# Altium PCB PCB AutoTimer.PcbDoc
Units mm, origin at the board's own origin, x right, y up, seen from the top; angles counter-clockwise.
Board outline 83 x 118 mm, 2 copper layers (Top Layer, Bottom Layer), stack 1.071 mm thick; 45 components, 55 nets, 187 pads, 9 vias.
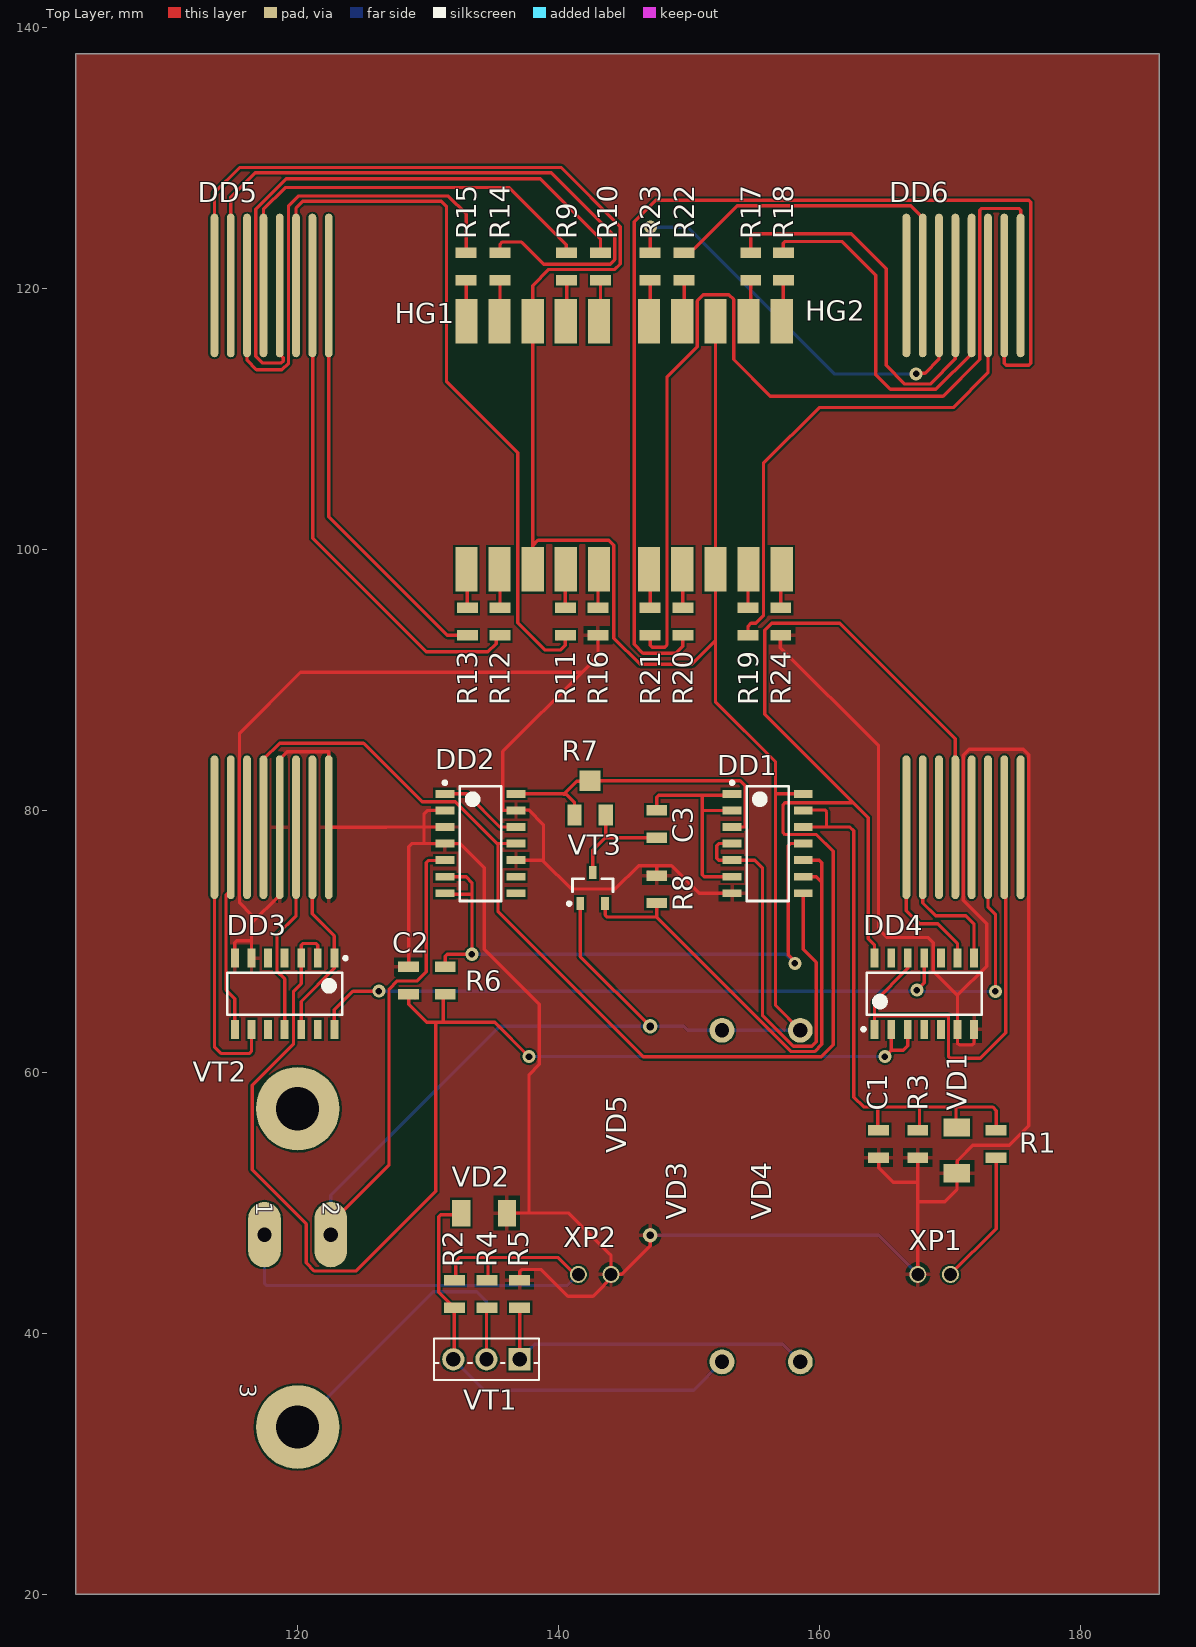
[diagram p0: Top Layer view]
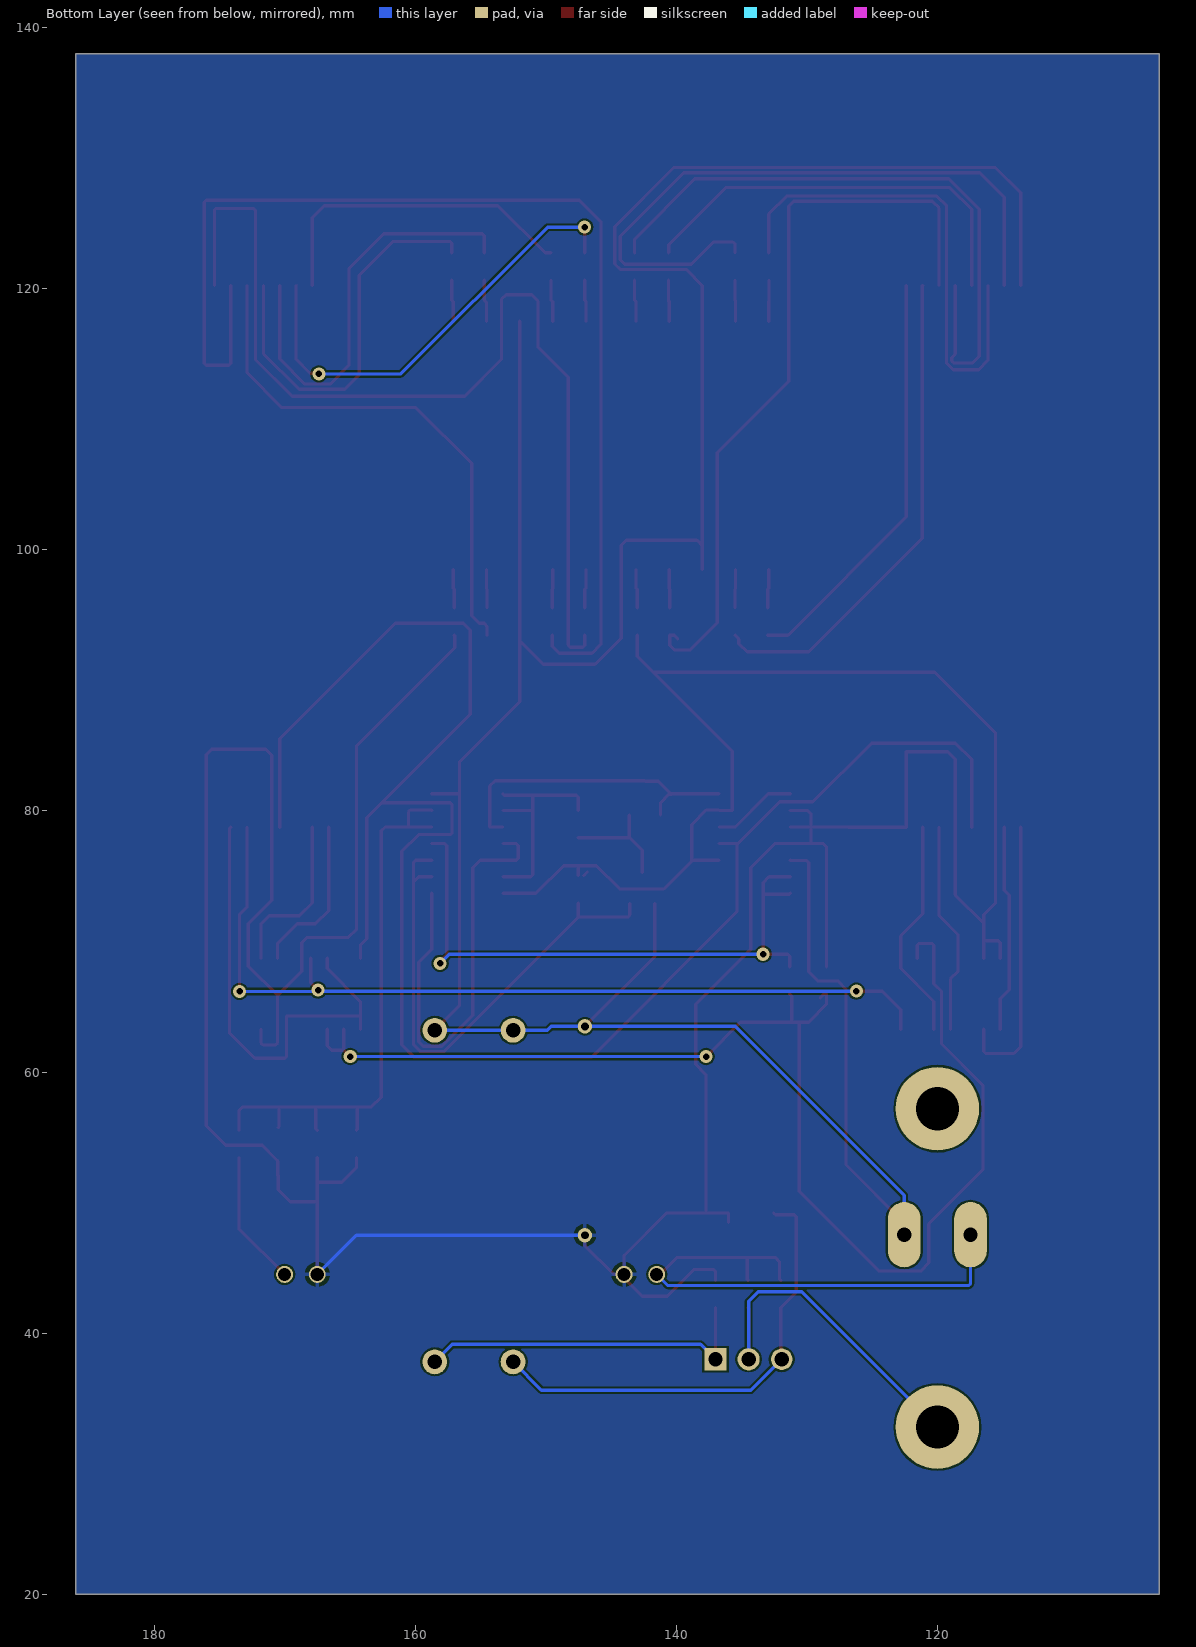
[diagram p1: Bottom Layer view, seen from below]

## Layer stack, top to bottom
Top Solder: solder mask 0.0102, Solder Resist, Dk 3.5
Top Layer: signal copper 0.0356
Dielectric 1: dielectric 1, FR-4, Dk 4.8
Bottom Layer: signal copper 0.0356
Bottom Solder: solder mask 0.0102, Solder Resist, Dk 3.5

## Board outline
103,20 103,138 186,138 186,20

## Design rules (kind name [scope] priority, off if disabled: settings)
Clearance [All] p1: gap=0.15 ignorepadtopadclearanceinfootprint=FALSE except(0.2: Via-Via; 0.3: THPad-THPad)
ComponentClearance [All] p1: gap=0.5 collisioncheckmode=3 verticalgap=0 showdistances=FALSE
HoleSize [All] p1: absolutevalues=TRUE maxlimit=5 minlimit=0.3 maxpercent=80.000 minpercent=20.000
PolygonConnect [All] p1: connectstyle=Relief reliefconductorwidth=0.3 reliefentries=4 polygonreliefangle="90 Angle" airgapwidth=0.3
RoutingVias [All] p1: holewidth=0.5 width=1 viastyle="Through Hole" minholewidth=0.3 minwidth=0.5 maxholewidth=1 maxwidth=1.5
SolderMaskExpansion [All] p1: expansion=0.102 istentingtop=FALSE
Width [All] p1: maxlimit=1 minlimit=0.25 preferedwidth=0.254
28 further rules are at their usual default settings.

## Components (designator, comment, footprint, x,y, rotation, side; value= is the part's Value field where it differs from the comment)
C1 "С-0805 50 В 4,7 мкФ 10% X7R KEMET" 0805 164.5,54.5 r90 top value="4,7 мкФ"
C2 "С-0805 50 В 1 мкФ 10% X7R KEMET" 0805 128.5,67 r90 top value="1 мкФ"
C3 "С-0805 50 В 1 мкФ 10% X7R KEMET" 0805 147.5,79 r90 top value="1 мкФ"
DD1 "SN74LS00 Texas Insturments" "SN74LS00 SN74LS90 FOOTPRINT" 156,77.5 r0 top
DD2 "SN74LS90 Texas Insturments" "SN74LS00 SN74LS90 FOOTPRINT" 134,77.5 r0 top
DD3 "SN74LS90 Texas Insturments" "SN74LS00 SN74LS90 FOOTPRINT" 119,66 r270 top
DD4 "SN74LS90 Texas Insturments" "SN74LS00 SN74LS90 FOOTPRINT" 168,66 r90 top
DD5 "К514ПР1 *" "К514ПР1 FOOTPRINT" 118,99.5 r270 top
DD6 "К514ПР1 *" "К514ПР1 FOOTPRINT" 171,99.5 r270 top
HG1 "KCSA56-105 Kingbright" KCSA56-105_FOOTPRINT 138,108 r0 top
HG2 "KCSA56-105 Kingbright" KCSA56-105_FOOTPRINT 152,108 r0 top
R1 "R-0805 0,125 Вт 6,2 кОм 5% Yageo" 0805 173.5,54.5 r270 top value="6,2 кОм"
R2 "R-0805 0,125 Вт 3 кОм 5% Yageo" 0805 132,43 r90 top value="3 кОм"
R3 "R-0805 0,125 Вт 2 кОм 5% Yageo" 0805 167.5,54.5 r90 top value="2 кОм"
R4 "R-0805 0,125 Вт 510 Ом 5% Yageo" 0805 134.5,43 r270 top value="510 Ом"
R5 "R-0805 0,125 Вт 390 Ом 5% Yageo" 0805 137,43 r270 top value="390 Ом"
R6 "R-0805 0,125 Вт 1,2 кОм 5% Yageo" 0805 131.3,67 r90 top value="1,2 кОм"
R7 "3313J-1 0,125 Вт 10 кОм 20% Mouzer" "R-3313J-1 FOOTPRINT" 142.4,81 r0 top value="10 кОм"
R8 "R-0805 0,125 Вт 300 Ом 5% Yageo" 0805 147.5,74 r270 top value="300 Ом"
R9 "R-0805 0,125 Вт 240 Ом 5% Yageo" 0805 140.6,121.7 r270 top value="240 Ом"
R10 "R-0805 0,125 Вт 240 Ом 5% Yageo" 0805 143.2,121.7 r270 top value="240 Ом"
R11 "R-0805 0,125 Вт 240 Ом 5% Yageo" 0805 140.5,94.5 r90 top value="240 Ом"
R12 "R-0805 0,125 Вт 240 Ом 5% Yageo" 0805 135.5,94.5 r90 top value="240 Ом"
R13 "R-0805 0,125 Вт 240 Ом 5% Yageo" 0805 133,94.5 r90 top value="240 Ом"
R14 "R-0805 0,125 Вт 240 Ом 5% Yageo" 0805 135.5,121.7 r270 top value="240 Ом"
R15 "R-0805 0,125 Вт 240 Ом 5% Yageo" 0805 132.9,121.7 r270 top value="240 Ом"
R16 "R-0805 0,125 Вт 240 Ом 5% Yageo" 0805 143,94.5 r90 top value="240 Ом"
R17 "R-0805 0,125 Вт 240 Ом 5% Yageo" 0805 154.7,121.7 r270 top value="240 Ом"
R18 "R-0805 0,125 Вт 240 Ом 5% Yageo" 0805 157.2,121.7 r270 top value="240 Ом"
R19 "R-0805 0,125 Вт 240 Ом 5% Yageo" 0805 154.5,94.5 r90 top value="240 Ом"
R20 "R-0805 0,125 Вт 240 Ом 5% Yageo" 0805 149.5,94.5 r90 top value="240 Ом"
R21 "R-0805 0,125 Вт 240 Ом 5% Yageo" 0805 147,94.5 r90 top value="240 Ом"
R22 "R-0805 0,125 Вт 240 Ом 5% Yageo" 0805 149.6,121.7 r270 top value="240 Ом"
R23 "R-0805 0,125 Вт 240 Ом 5% Yageo" 0805 147,121.7 r270 top value="240 Ом"
R24 "R-0805 0,125 Вт 240 Ом 5% Yageo" 0805 157,94.5 r90 top value="240 Ом"
VD1 "1N4624 BSC" DO-213 170.5,54 r90 top
VD2 "1N4624 BSC" DO-213 134.275,49.2 r180 top
VD3 "1N533B MICROSEMI" T-18 152.5,50.5 r90 top
VD4 "1N533B MICROSEMI" T-18 158.5,50.5 r270 top
VD5 "1N710A MICROCHIP" DO-35 147,55.5 r90 top
VT1 "BD233 SavantIC" ТО-126 137,38 r180 top
VT2 "2N5887 ETC" TO66 120,45 r270 top
VT3 "2N3458 MOTOROLA" SOT23 142.6,74.1 r90 top
XP1 "DS1021 Ningbo Zhenqin Electronic" PLS-2 170,44.5 r180 top
XP2 "DS1021 Ningbo Zhenqin Electronic" PLS-2 141.5,44.5 r0 top

## Footprints (in the part's own frame and the unit in brackets; to place one, negate y for a bottom-side part, rotate by r counter-clockwise, add the part's x,y. Pads: shape width x height; smd on the part's side, far side on the other; paste and mask are expansions set on the pad)
0805 [mm]
  rect 0.8x1.6 smd: 1(-1.05,0) 2(1.05,0)
  body extent -1.05,-0.65 1.05,0.65, height 0.4
DO-35 [mm]
  round 1.1 hole 0.6: 1(-8,0) 2(8,0)
  body extent -2.2,-0.9 2.2,1, height 1.9
DO-213 [mm]
  rect 1.4x2.03 smd: 1(-1.75,0) 2(1.75,0)
  body extent -2.65,-1.2 2.65,1.2, height 1.7
KCSA56-105_FOOTPRINT [mm]
  rect 1.7x3.4 smd: 1(-5.08,-9.5) 2(-2.54,-9.5) 3(0,-9.5) 4(2.54,-9.5) 5(5.08,-9.5) 6(5.08,9.5) 7(2.54,9.5) 8(0,9.5) 9(-2.54,9.5) 10(-5.08,9.5)
  body extent -6.18,-11.3 6.12,11.3, height 3.75
PLS-2 [mm]
  round 1.3 hole 1: 1(0,0) 2(2.5,0)
  body extent -1.31,-1.27 3.77,1.27, height 8.47
"R-3313J-1 FOOTPRINT" [mm]
  rect 1.1x1.6 smd: 1(1.195,-1.31) 3(-1.195,-1.31)
  rect 1.6x1.6 smd: 2(0,1.31)
  body extent -1.95,-2.28 1.97,2.29, height 2.2
"SN74LS00 SN74LS90 FOOTPRINT" [mm] "SOIC, 14-Leads, Body 8,65x3,90mm, Pitch 1,27mm, IPC Medium Density"
  rect 1.45x0.6 smd: 1(-2.725,3.81) 2(-2.725,2.54) 3(-2.725,1.27) 4(-2.725,0) 5(-2.725,-1.27) 6(-2.725,-2.54) 7(-2.725,-3.81) 8(2.725,-3.81) 9(2.725,-2.54) 10(2.725,-1.27) 11(2.725,0) 12(2.725,1.27) 13(2.725,2.54) 14(2.725,3.81)
  silkscreen extent -2.85,-4.4 1.6,4.78, body extent -2,-4.4 2,4.4, height 1.75
SOT23 [mm] "SOT23, 3-Leads, Body 2,86x2,45mm, Pitch 0,95mm, IPC Medium Density"
  rect 1x0.6 smd: 1(-1.2,0.95) 2(-1.2,-0.95) 3(1.2,0)
  silkscreen extent -1.32,-1.55 0.7,1.92, body extent -0.7,-1.52 0.7,1.53, height 1.02
T-18 [mm]
  round 1.9 hole 1.1: 1(-12.7,0) 2(12.7,0)
  body extent -4.44,-1.84 4.44,1.84, height 3.68
TO66 [mm]
  oval 5x2.5 hole 1.1: 1(-2.54,-2.54) 2(-2.54,2.54)
  round 6.4 hole 3.3: 3(12.192,0) 4(-12.192,0)
  body extent -15.9,-8.64 15.9,8.64, height 8.6
"К514ПР1 FOOTPRINT" [mm]
  oval 11x0.6 smd: 1(20.75,-4.375) 2(20.75,-3.125) 3(20.75,-1.875) 4(20.75,-0.625) 5(20.75,0.625) 6(20.75,1.875) 7(20.75,3.125) 8(20.75,4.375) 9(-20.75,4.375) 10(-20.75,3.125) 11(-20.75,1.875) 12(-20.75,0.625) 13(-20.75,-0.625) 14(-20.75,-1.875) 15(-20.75,-3.125) 16(-20.75,-4.375)
  body extent -15.5,-5.87 15.5,6.13, height 2.5
ТО-126 [mm]
  rect 1.7x1.7 hole 1.1 mask+0: 1(0,0)
  round 1.7 hole 1.1 mask+0: 2(2.54,0)
  round 1.7 / inner round 1.651 / far side round 1.651 hole 1.1 mask+0: 3(5.08,0)
  silkscreen extent -1.49,-1.57 6.57,1.57, body extent -1.36,-1.45 6.44,1.45, height 8.89

## Part data
C1: library part "C-0805 4,7мкФ", "0805", Manufacturer=KEMET, Package=С-0805, Temp_Coef=X7R, Tolerance=10%, Voltage="50 В", ComponentLink1Description="New link", ComponentLink1URL=https://electronoff.ua/good/kondensator-keramicheskij-0805-4-7uf-50v-x7r-10-100sht.php
C2 C3: library part "C-0805 1мкФ", "0805", Manufacturer=KEMET, Package=С-0805, Temp_Coef=X7R, Tolerance=10%, Voltage="50 В", ComponentLink1Description="New link", ComponentLink1URL=https://electronoff.ua/good/kondensator-keramicheskij-1206-1uf-50v-x7r-10-100sht.php
DD1: library part SN74LS00, Manufacturer="Texas Insturments", ComponentLink1Description=datasheet, ComponentLink1URL=file:///C:/Users/aleks/Downloads/Telegram%20Desktop/sn7400-sp.pdf, Name=SN74LS00
DD2 DD3 DD4: library part SN74LS90, Manufacturer="Texas Insturments", ComponentLink1Description=datasheet, ComponentLink1URL=file:///C:/Users/aleks/Downloads/Telegram%20Desktop/SN7490AN.pdf, Name=SN74LS90
DD5 DD6: library part К514ПР1, ComponentLink1Description=datasheet, ComponentLink1URL=http://ic-info.ru/upload/iblock/20e/514%D0%9F%D0%A01.pdf, Name=К514ПР1
HG1 HG2: library part KCSA56-105, Manufacturer=Kingbright, ComponentLink1Description=datasheet, ComponentLink1URL=http://www.kosmodrom.com.ua/pdf/KCSA56-105.pdf, Name=KCSA56-105
R1: library part "R-0805 6,2кОм", Manufacturer=Yageo, Package=R-0805, Power="0,125 Вт", Tolerance=5%
R2: library part "R-0805 3кОм", Manufacturer=Yageo, Package=R-0805, Power="0,125 Вт", Tolerance=5%
R3: library part "R-0805 2кОм", Manufacturer=Yageo, Package=R-0805, Power="0,125 Вт", Tolerance=5%
R4: library part "R-0805 510Ом", Manufacturer=Yageo, Package=R-0805, Power="0,125 Вт", Tolerance=5%
R5: library part "R-0805 390Ом", Manufacturer=Yageo, Package=R-0805, Power="0,125 Вт", Tolerance=5%
R6: library part "R-0805 1,2кОм", Manufacturer=Yageo, Package=R-0805, Power="0,125 Вт", Tolerance=5%
R7: library part "R-3313J-1 10кОм", Manufacturer=Mouzer, Package=3313J-1, Power="0,125 Вт", Tolerance=20%, ComponentLink1Description="New link", ComponentLink1URL=https://eu.mouser.com/datasheet/2/54/3313-776425.pdf
R8: library part "R-0805 300Ом", Manufacturer=Yageo, Package=R-0805, Power="0,125 Вт", Tolerance=5%
R9 R10 R11 R12 R13 R14 R15 R16 R17 R18 R19 R20 R21 R22 R23 R24: library part "R-0805 240Ом", Manufacturer=Yageo, Package=R-0805, Power="0,125 Вт", Tolerance=5%
VD1 VD2: library part 1N4624, "DO-213", Manufacturer=BSC, ComponentLink1Description=datasheet, ComponentLink1URL=https://datasheetspdf.com/pdf/969296/CENTRALSEMICONDUCTOR/1N4624/1, Name=1N4624
VD3 VD4: library part 1N533B, "T-18", Manufacturer=MICROSEMI, ComponentLink1Description=datasheet, ComponentLink1URL=http://www.datasheetcatalog.com/datasheets_pdf/1/N/5/3/1N5333B.shtml, Name=1N533B
VD5: library part 1N710A, "DO-35", Manufacturer=MICROCHIP, ComponentLink1Description=datasheet, ComponentLink1URL=https://datasheetspdf.com/pdf/569488/CentralSemiconductor/1N710A/1, Name=1N710A
VT1: library part BD233, "TO-126", Manufacturer=SavantIC, ComponentLink1Description=datasheet, ComponentLink1URL=https://datasheetspdf.com/pdf-file/641918/SavantIC/BD233/1, Name=BD233
VT2: library part 2N5887, "TO66", Manufacturer=ETC, ComponentLink1Description=datasheet, ComponentLink1URL=https://datasheetspdf.com/datasheet/2N5891.html, Name=2N5887
VT3: library part 2N3458, "SOT23", Manufacturer=MOTOROLA, ComponentLink1Description=datasheet, ComponentLink1URL=https://datasheetspdf.com/datasheet/2N3458.html, Name=2N3458
XP1 XP2: library part DS1021, "PLS-2_1x2", Manufacturer="Ningbo Zhenqin Electronic", Name=DS1021

## Via types
v1: diameter 1, hole 0.5, Top Layer to Bottom Layer, 9 vias

## Nets (pads, with @x,y where several pads share a name; then routed paths per layer and width w, separated by ;. In a path a pad name is that pad's centre, name@x,y a point inside that pad or via, vN(x,y) a via of type N, cw(c..) or ccw(c..) an arc to the next point about the centre after c; other vN are vias at no path point)
GND: C1.1 C2.2 DD1.7 DD2.2 DD2.3 DD2.4 DD2.10 DD2.13 DD3.6 DD3.7 DD4.6 DD4.7 DD5.5 DD5.8 R3.1 R5.1 R8.1 R16.1 R24.1 VD1.1 VD2.1 VD5.1 XP1.2 XP2.2 | length 339.8
  Top Layer w0.254: DD3.7 115.19,69.91 115.339,70.059 116.46,70.059 ; DD3.6 116.46,70.059 ; C2.2 128.499,68.05 128.499,77.271 128.727,77.5 129.7,77.5 ; DD2.3 129.675,78.77 ; DD2.2 129.965,80.04 129.675,79.75 129.675,78.77 ; VD2.1@136,48.5 VD2.1@136,49.2 ; VD2.1 137.725,49.2 ; DD2.10 138.735,76.23 138.825,76.14 ; R5.1 137,44.726 137.149,44.875 138.65,44.875 140.7,42.825 142.625,42.825 XP2.2@144.3,44.5 ; R16.1 143,91.844 141.781,90.625 ; R8.1@146.827,75.323 R8.1@147.1,75.05 ; VD5.1 147,46.695 144.805,44.5 XP2.2@144.3,44.5 ; R8.1 147.5,75.812 ; DD1.7 150.76,73.69 148.638,75.812 147.5,75.812 ; R24.1 156.975,93.425 156.975,92.5 164.49,84.985 164.49,70.942 165.125,70.307 168.275,70.307 168.681,69.901 168.681,67.725 170.54,65.867 ; C1.1 164.5,52.675 165.625,51.55 167.5,51.55 ; XP1.2 167.5,50.075 ; R3.1 167.5,51.55 ; DD4.7 171.81,62.224 171.661,62.075 170.689,62.075 170.54,62.224 DD4.6 170.54,65.867 ; 116.46,70.059 116.46,71.393 ; 116.46,71.393 116.46,72.059 115.545,72.974 115.545,85.954 120.216,90.625 141.781,90.625 ; 116.46,71.393 118.625,73.558 DD5.5 118.625,83.947 119.209,84.531 122.375,84.531 DD5.8 126.797,78.75 126.817,78.77 129.675,78.77 ; 129.675,78.77 129.675,77.525 129.7,77.5 ; 129.7,77.5 DD2.4 132.45,77.5 134.3,75.65 134.3,69.408 138.506,65.202 138.506,60.579 137.725,59.798 137.725,49.2 ; 137.725,49.2 140.751,49.2 143.851,46.1 144,45.951 XP2.2 XP2.2@144.3,44.5 ; 138.825,76.14 138.825,76.23 138.825,78.941 137.691,80.075 136.76,80.075 DD2.13 135.712,80.04 135.712,84.557 141.781,90.625 ; 138.825,76.14 140.94,74.025 144.332,74.025 146.119,75.812 147.5,75.812 ; 167.5,50.075 167.5,51.55 ; 167.5,50.075 169.575,50.075 170.5,51 170.5,52.05 170.525,52.075 170.525,53.191 170.674,53.34 171.715,54.381 174.498,54.381 175.997,55.88 175.997,84.315 175.577,84.734 171.45,84.734 170.993,84.277 170.993,73.152 172.775,71.37 172.775,68.102 170.54,65.867
  Bottom Layer w0.254: VD5.1 164.5,47.5 XP1.2
NetC1_2: C1.2 DD1.12 DD1.13 R1.1 R3.2 VD1.2 | length 45.5
  Top Layer w0.254: DD1.12 160.513,78.77 ; DD1.13 158.76,80.075 160.364,80.075 160.513,79.926 160.513,78.77 ; C1.2 164.425,55.625 164.425,57.325 ; R3.2 167.625,55.675 167.625,57.325 ; VD1.2 170.425,55.825 170.425,57.325 ; R1.1 173.5,57.05 173.225,57.325 170.425,57.325 ; 160.513,78.77 162.301,78.77 162.6,78.471 162.6,58.075 163.35,57.325 164.425,57.325 ; 164.425,57.325 167.625,57.325 ; 167.625,57.325 170.425,57.325
NetC2_1: C2.1 DD3.2 DD3.3 DD4.2 DD4.3 R6.1 | length 102.2
  Top Layer w0.254: DD3.2 121.54,69.701 121.391,69.85 120.419,69.85 120.27,69.701 DD3.3 120.27,66.778 119.685,66.192 119.685,62.179 116.51,59.004 116.51,52.502 120.65,48.362 120.65,45.39 121.285,44.755 124.46,44.755 130.57,50.865 130.57,63.73 ; C2.1@128.982,65.677 128.709,65.95 C2.1 128.5,65.175 129.87,63.805 131.125,63.805 ; R6.1 131.151,65.801 131.151,63.831 131.125,63.805 ; v1(137.719,61.189) 135.102,63.805 131.125,63.805 ; v1(164.973,61.189) 165.46,61.676 ; DD4.2 165.46,61.676 ; DD4.3 166.73,62.005 166.401,61.676 165.46,61.676
  Bottom Layer w0.254: v1(137.719,61.189) v1(164.973,61.189)
NetC3_1: C3.1 R7.1 VT3.3 | length 8.7
  Top Layer w0.254: VT3.3 142.6,76.987 143.595,77.982 ; R7.1 143.595,77.982 ; C3.1 143.627,77.95 143.595,77.982
NetC3_2: C3.2 DD1.1 DD1.2 DD1.6 | length 17.6
  Top Layer w0.254: C3.2 147.5,81.051 147.649,81.2 151,81.2 ; DD1.6 151.149,74.96 151,75.109 151,79.925 ; DD1.2 151.115,80.04 151,79.925 ; DD1.1 153.165,81.2 151,81.2 ; 151,79.925 151,81.2
NetDD1_3: DD1.3 DD2.14 R7.2 R7.3 | length 24.4
  Top Layer w0.254: DD2.14 136.74,81.325 140.409,81.325 ; R7.3 141.205,80.645 140.563,81.287 140.371,81.287 141.368,82.284 142.374,82.284 R7.2 153.885,82.31 154.28,81.915 154.28,78.77 DD1.3
NetDD1_4: DD1.4 DD1.5 DD1.8 | length 34.4
  Top Layer w0.254: DD1.4 152.249,77.5 152.1,77.351 152.1,76.379 152.249,76.23 155.016,76.23 155.6,75.646 155.6,64.346 157.973,61.973 159.385,61.973 159.727,62.315 159.727,68.397 158.725,69.399 DD1.8
NetDD1_9: DD1.9 DD1.10 R8.2 VT3.2 | length 40.1
  Top Layer w0.254: VT3.2 143.557,72.893 143.557,72.024 143.706,71.875 147.5,71.875 ; R8.2 147.5,71.875 ; DD1.9 159.727,74.96 160.131,74.556 ; DD1.10 159.945,76.23 160.131,76.044 160.131,74.556 ; 147.5,71.875 157.806,61.569 159.588,61.569 160.131,62.112 160.131,74.556
NetDD1_11: DD1.11 DD2.6 DD2.7 R6.2 | length 48.3
  Top Layer w0.254: DD2.7 131.353,73.612 133.312,73.612 133.35,73.575 ; DD2.6 131.285,74.95 132.9,74.95 133.35,74.5 133.35,73.575 ; R6.2 131.3,68.876 131.449,69.025 v1(133.35,69.025) 133.35,73.575 ; v1(158.09,68.326) 158.09,68.481 157.587,68.984 157.587,77.351 157.736,77.5 DD1.11
  Bottom Layer w0.254: v1(133.35,69.025) 157.391,69.025 v1(158.09,68.326)
NetDD2_1: DD2.1 DD2.12 | length 6.5
  Top Layer w0.254: DD2.1 132.944,81.31 135.484,78.77 DD2.12
NetDD2_11: DD2.11 DD4.14 DD5.4 DD6.4 | length 144.9
  Top Layer w0.254: DD5.4 117.375,83.947 118.62,85.192 125.044,85.192 129.54,80.696 132.08,80.696 135.276,77.5 DD2.11 ; 135.35,77.5 135.35,72.27 146.455,61.165 160.105,61.165 161.025,62.085 161.025,76.909 159.741,78.193 157.324,78.193 157.175,78.342 157.175,80.468 157.324,80.617 162.563,80.617 ; DD4.14 164.19,69.71 163.7,70.2 163.7,79.48 162.563,80.617 ; DD6.4 170.375,85.522 161.51,94.386 156.312,94.386 155.775,93.85 155.775,87.405 162.563,80.617
NetDD3_1: DD3.1 DD3.12 DD5.7 | length 17.2
  Top Layer w0.254: DD3.12 120.27,65.404 122.81,67.944 DD3.1 122.81,70.426 121.125,72.111 DD5.7
NetDD3_8: DD3.8 DD5.2 | length 15.9
  Top Layer w0.254: DD5.2 114.875,73.914 114.503,73.542 114.503,66.319 115.19,65.633 DD3.8
NetDD3_9: DD3.9 DD5.1 | length 21.6
  Top Layer w0.254: DD5.1 113.625,61.925 114.125,61.425 116.311,61.425 116.46,61.574 DD3.9
NetDD3_11: DD3.11 DD5.6 | length 16.3
  Top Layer w0.254: DD3.11 119,67.131 118.415,67.716 118.415,70.498 119.875,71.958 DD5.6
NetDD3_14: DD3.14 DD4.11 DD6.6 | length 68.3
  Top Layer w0.254: DD3.14 122.81,64.77 124.232,66.192 v1(126.213,66.192) ; v1@167.361,66.192 v1(167.437,66.269) 168,66.832 DD4.11 ; DD6.6 172.875,72.65 173.45,72.075 v1(173.45,66.175)
  Bottom Layer w0.254: v1(126.213,66.192) v1@167.361,66.192 ; v1(167.437,66.269) 167.53,66.175 v1(173.45,66.175)
NetDD4_1: DD4.1 DD4.12 DD6.7 | length 36.3
  Top Layer w0.254: DD4.1 164.19,64.287 ; DD4.12 166.73,67.941 164.19,65.401 164.19,64.287 ; DD6.7 174.227,78.648 174.227,63.002 172.275,61.05 169.999,61.05 169.85,61.199 169.85,64.287 164.19,64.287
NetDD4_8: DD4.8 DD6.2 | length 13
  Top Layer w0.254: DD6.2 167.875,72.949 168.862,71.962 171.167,71.962 171.81,71.319 DD4.8
NetDD4_9: DD4.9 DD6.1 | length 12.5
  Top Layer w0.254: DD6.1 166.625,72.364 167.64,71.349 169.041,71.349 170.54,69.85 DD4.9
NetDD5_9: DD5.9 R13.1 | length 32.1
  Top Layer w0.254: DD5.9 122.375,102.517 131.442,93.45 R13.1
NetDD5_10: DD5.10 R12.1 | length 38.1
  Top Layer w0.254: DD5.10 121.15,120.225 121.15,100.884 129.851,92.183 134.576,92.183 135.21,92.818 135.21,93.177 135.483,93.45 R12.1
NetDD5_11: DD5.11 R11.1 | length 58.1
  Top Layer w0.254: DD5.11 119.875,126.187 120.383,126.695 131.013,126.695 131.394,126.314 131.394,112.903 136.855,107.442 136.855,94.42 138.95,92.325 140.125,92.325 140.5,92.7 R11.1 140.158,93.45 R11.1@139.885,93.177
NetDD5_12: DD5.12 R10.1 | length 49.9
  Top Layer w0.254: DD5.12 118.625,114.997 118.894,114.728 118.894,114.464 118.745,114.315 117.294,114.315 116.798,114.811 116.798,126.082 119.136,128.42 138.58,128.42 143.2,123.8 R10.1
NetDD5_13: DD5.13 R9.1 | length 32.2
  Top Layer w0.254: DD5.13 117.375,126.087 119.038,127.75 136.203,127.75 140.571,123.382 140.571,122.779 R9.1
NetDD5_14: DD5.14 R15.1 | length 39
  Top Layer w0.254: DD5.14 116.125,114.512 116.84,113.797 118.798,113.797 119.298,114.297 119.298,126.363 120.036,127.102 131.547,127.102 132.918,125.73 132.918,122.75 R15.1
NetDD5_15: DD5.15 R14.1 | length 51.1
  Top Layer w0.254: DD5.15 114.875,127 116.755,128.88 139.421,128.88 144.297,124.003 144.297,122.237 143.939,121.879 138.846,121.879 137.15,123.575 135.649,123.575 135.5,123.426 R14.1
NetDD6_9: DD6.9 R21.1 | length 78.8
  Top Layer w0.254: R21.1 147,92.689 147.149,92.54 148.121,92.54 148.285,92.704 148.285,113.233 150.597,115.545 150.597,119.062 151.066,119.532 153.035,119.532 153.391,119.177 153.391,114.579 156.195,111.775 169.433,111.775 172.237,114.579 172.237,126.001 172.386,126.15 175.226,126.15 175.375,126.001 DD6.9
NetDD6_10: DD6.10 R20.1 | length 89
  Top Layer w0.254: R20.1 149.5,92.613 148.962,92.075 146.45,92.075 145.771,92.754 145.771,125.12 147.422,126.771 176.001,126.771 176.15,126.623 176.15,114.299 176.001,114.15 174.274,114.15 174.125,114.299 DD6.10
NetDD6_11: DD6.11 R19.1 | length 40.6
  Top Layer w0.254: R19.1 154.5,94.151 154.721,94.372 155.091,94.372 155.677,94.958 155.677,106.629 159.947,110.9 170.217,110.9 172.875,113.558 DD6.11
NetDD6_12: DD6.12 R18.1 | length 30.7
  Top Layer w0.254: R18.1 157.2,123.476 157.349,123.625 161.685,123.625 164.287,121.023 164.287,113.413 165.406,112.294 168.885,112.294 171.625,115.034 DD6.12
NetDD6_13: DD6.13 R17.1 | length 32.6
  Top Layer w0.254: R17.1 154.7,124.051 154.849,124.2 162.414,124.2 165.075,121.539 165.075,114.125 166.502,112.698 168.451,112.698 170.375,114.622 DD6.13
NetDD6_14: DD6.14 R23.1 | length 34.9
  Top Layer w0.254: R23.1 147.015,122.75 v1(147.015,124.714) ; v1(167.375,113.475) 167.431,113.531 168.056,113.531 169.122,114.597 169.122,120.247 DD6.14
  Bottom Layer w0.254: v1(147.015,124.714) 149.861,124.714 161.1,113.475 v1(167.375,113.475)
NetDD6_15: DD6.15 R22.1 | length 25.4
  Top Layer w0.254: R22.1 150.055,122.75 153.67,126.365 166.961,126.365 167.875,125.451 DD6.15
NetHG1_1: HG1.1 R13.2 | length 3
  Top Layer w0.254: HG1.1 132.92,97.057 133,96.977 R13.2
NetHG1_2: HG1.2 R12.2 | length 3
  Top Layer w0.254: HG1.2 135.46,97.043 135.5,97.003 R12.2
NetHG1_4: HG1.4 R11.2 | length 3
  Top Layer w0.254: R11.2 140.5,97.003 140.54,97.043 HG1.4
NetHG1_5: HG1.5 R16.2 | length 3
  Top Layer w0.254: R16.2 143,96.977 143.08,97.057 HG1.5
NetHG1_6: HG1.6 R10.2 | length 3.2
  Top Layer w0.254: HG1.6 143.08,118.999 143.2,119.119 R10.2
NetHG1_7: HG1.7 R9.2 | length 3.2
  Top Layer w0.254: HG1.7 140.54,119.024 140.6,119.084 R9.2
NetHG1_9: HG1.9 R14.2 | length 3.2
  Top Layer w0.254: HG1.9 135.46,119.05 135.5,119.09 R14.2
NetHG1_10: HG1.10 R15.2 | length 3.2
  Top Layer w0.254: R15.2 132.9,119.07 132.92,119.05 HG1.10
NetHG2_1: HG2.1 R21.2 | length 3
  Top Layer w0.254: HG2.1 146.92,97.057 147,96.977 R21.2
NetHG2_2: HG2.2 R20.2 | length 3
  Top Layer w0.254: HG2.2 149.46,97.043 149.5,97.003 R20.2
NetHG2_4: HG2.4 R19.2 | length 3
  Top Layer w0.254: R19.2 154.5,97.003 154.54,97.043 HG2.4
NetHG2_5: HG2.5 R24.2 | length 3
  Top Layer w0.254: R24.2 157,96.977 157.08,97.057 HG2.5
NetHG2_6: HG2.6 R18.2 | length 3.2
  Top Layer w0.254: HG2.6 157.08,118.999 157.2,119.119 R18.2
NetHG2_7: HG2.7 R17.2 | length 3.2
  Top Layer w0.254: HG2.7 154.54,118.974 154.7,119.134 R17.2
NetHG2_9: HG2.9 R22.2 | length 3.2
  Top Layer w0.254: HG2.9 149.46,118.999 149.6,119.139 R22.2
NetHG2_10: HG2.10 R23.2 | length 3.2
  Top Layer w0.254: HG2.10 146.92,119.024 147,119.104 R23.2
NetR1_2: R1.2 XP1.1 | length 10.4
  Top Layer w0.254: XP1.1 173.5,48 R1.2
NetR2_1: R2.1 VD2.2 VD3.1 VT1.3 | length 35.7
  Top Layer w0.254: VT1.3 132,38.08 R2.1 130.81,43.14 130.81,48.926 130.959,49.075 132.4,49.075 VD2.2
  Bottom Layer w0.254: VT1.3 134.295,35.625 150.325,35.625 VD3.1
NetR2_2: R2.2 R4.1 VT2.1 XP2.1 | length 41.5
  Top Layer w0.254: R2.2 132.1,44.15 132.1,45.475 132.425,45.8 134.575,45.8 ; R4.1 134.575,44.125 134.575,45.8 ; XP2.1 141.217,44.5 139.917,45.8 134.575,45.8
  Bottom Layer w0.254: VT2.1 117.46,43.799 117.609,43.65 140.65,43.65 XP2.1
NetR4_2: R4.2 VT1.2 VT2.3 | length 27.5
  Top Layer w0.254: VT1.2 134.46,41.91 R4.2
  Bottom Layer w0.254: VT2.3 130.372,43.18 133.725,43.18 134.46,42.445 VT1.2
NetR5_2: R5.2 VD4.2 VT1.1 | length 26.5
  Top Layer w0.254: VT1.1 R5.2
  Bottom Layer w0.254: VT1.1 138.141,39.141 157.159,39.141 VD4.2
VccStab: DD1.14 DD2.5 DD5.16 HG1.3 HG1.8 HG2.3 HG2.8 VD3.2 VD4.1 VD5.2 VT2.2 VT3.1 | length 245
  Top Layer w0.254: DD5.16 113.625,127.341 115.57,129.286 140.183,129.286 144.704,124.765 144.704,121.895 144.284,121.475 139.23,121.475 138,120.245 HG1.8 138,100.33 ; VT2.2 122.54,48.423 127,52.883 127,66.345 127.635,66.98 129.155,66.98 129.85,67.675 129.85,76.051 129.999,76.2 131.245,76.2 DD2.5 ; HG1.3 138,100.33 ; VT3.1 141.65,68.85 VD5.2 ; HG2.8 HG2.3 152,93.025 ; VD4.1 156.6,65.1 156.6,81.275 ; DD1.14 156.635,81.31 156.6,81.275 ; 138,100.33 138.406,100.736 143.827,100.736 144.221,100.343 144.221,93.227 146.223,91.225 150.2,91.225 152,93.025 ; 152,93.025 152,88.36 156.6,83.76 156.6,81.275
  Bottom Layer w0.254: VT2.2 122.54,50.546 135.494,63.5 VD5.2 149.581,63.5 149.881,63.2 VD3.2 VD4.1
pads on no net: DD2.8 DD2.9 DD3.4 DD3.5 DD3.10 DD3.13 DD4.4 DD4.5 DD4.10 DD4.13 DD5.3 DD6.3 DD6.5 DD6.8 DD6.16 VT2.4

## Polygon pours and split planes (outlines as drawn)
GND on Top Layer "GND_L01_P001" (solid, remove dead copper, pour order 1): 103,138 186,138 186,20 103,20
GND on Bottom Layer "GND_L02_P002" (solid, remove dead copper, pour order 2): 103,138 186,138 186,20 103,20

## Silkscreen, mask and mechanical layers (free items; w line width, h text height)
Mechanical 1:
  the board outline again, w0.1

## Text inside footprints (layer, text, board x,y; h text height)
DD5: Top Assembly "1" at 112.754,86.246 h1.52 r270
DD6: Top Assembly "1" at 165.754,86.246 h1.52 r270
HG1: Top Assembly "1" at 132.754,101.004 h1.52
HG2: Top Assembly "1" at 146.754,101.004 h1.52
VT2: Top Overlay "2" at 121.905,50.08 h1.27 r270; Top Overlay "3" at 115.555,36.11 h1.27 r270; Top Overlay "1" at 116.825,50.08 h1.27 r270